# Altium PCB ShieldKL25zG18.PcbDoc
Units mm, origin at the board's own origin, x right, y up, seen from the top; angles counter-clockwise.
Board outline 56.26 x 59.94 mm, 2 copper layers (Top Layer, Bottom Layer); 24 components, 36 nets, 145 pads, 31 vias.
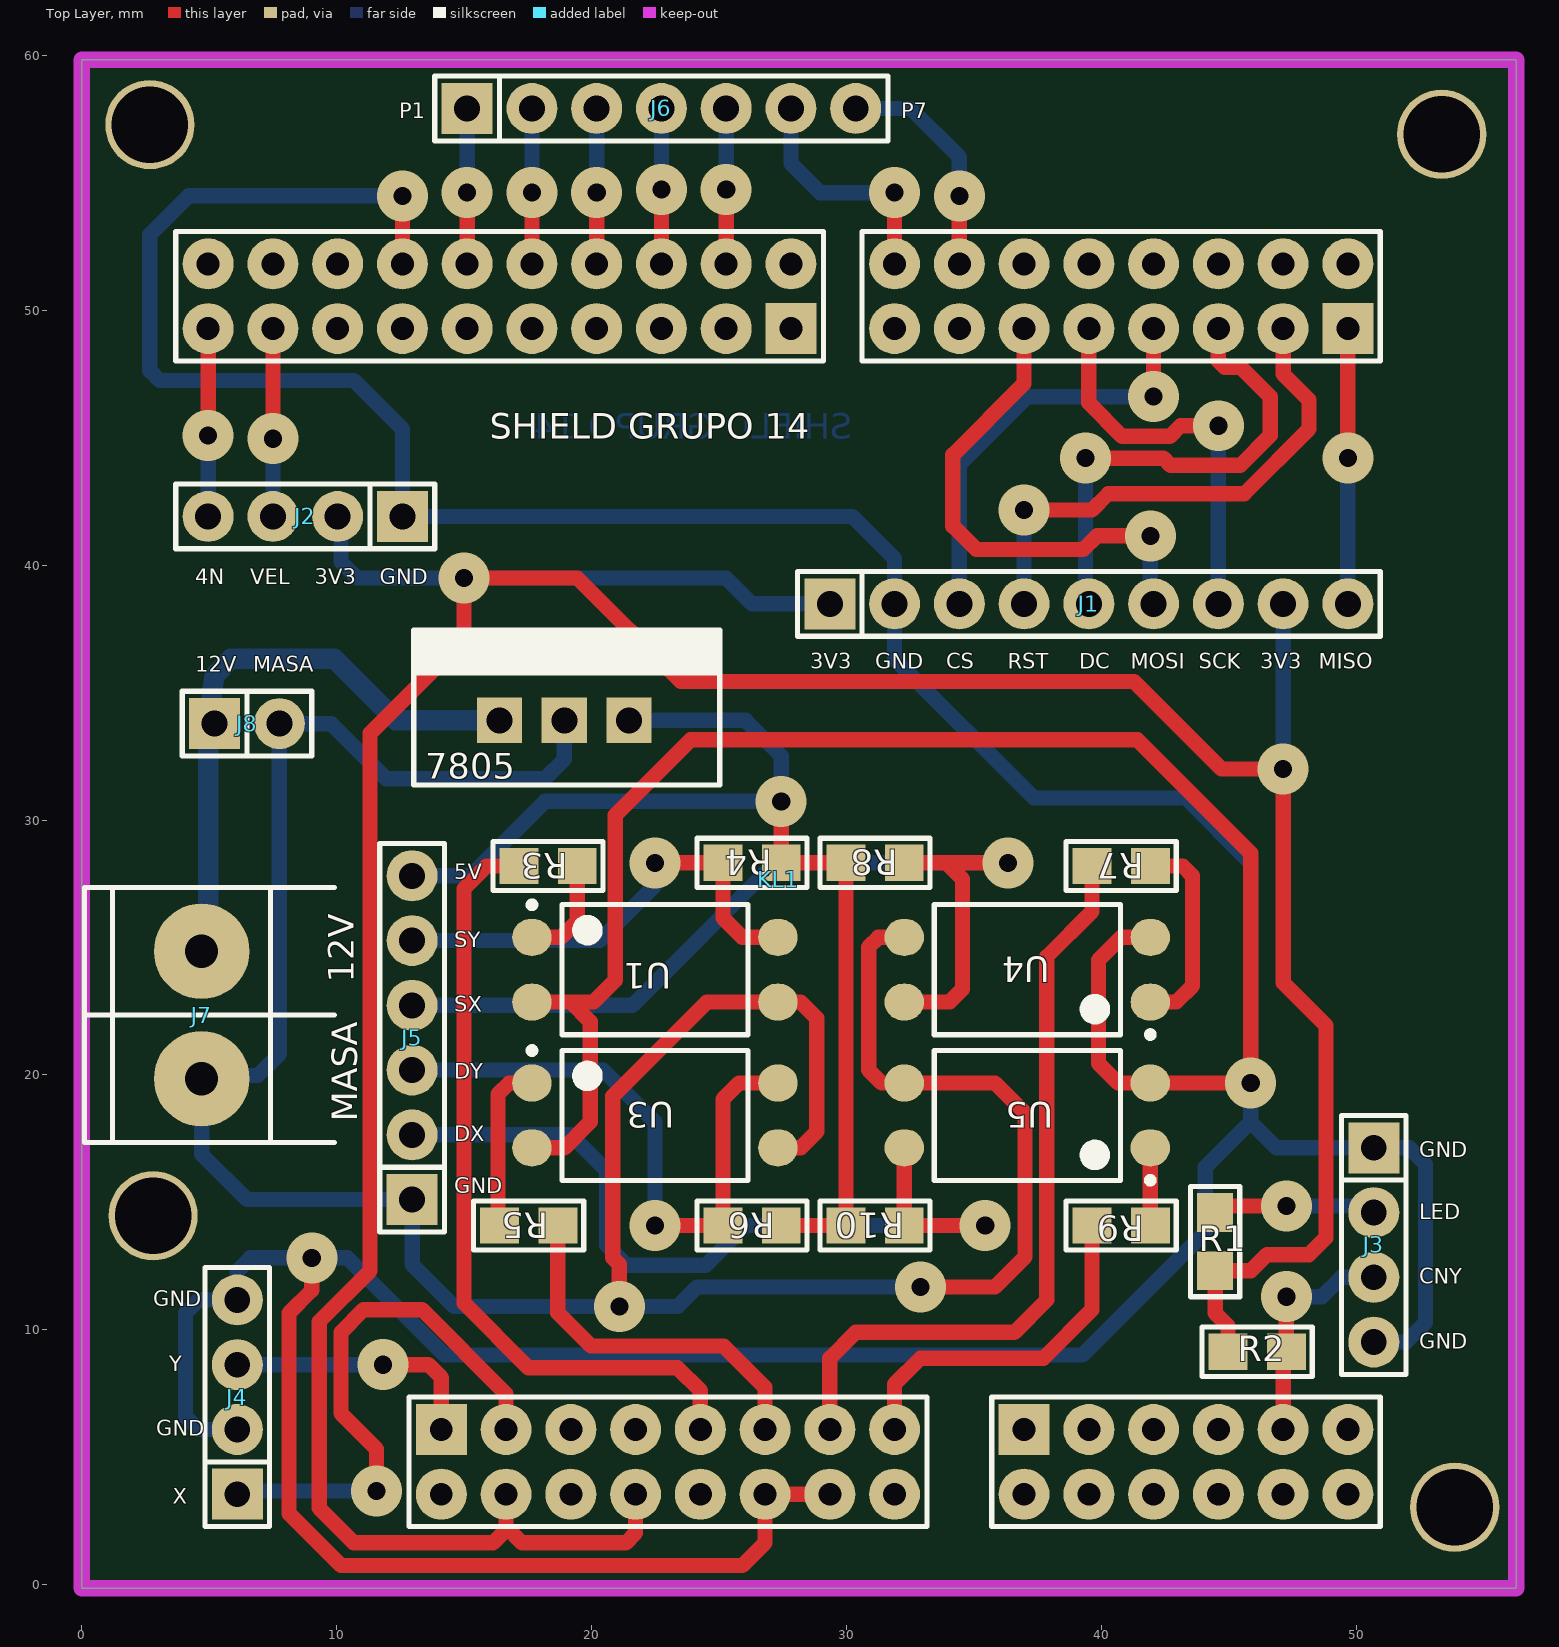
[diagram p0: Top Layer view]
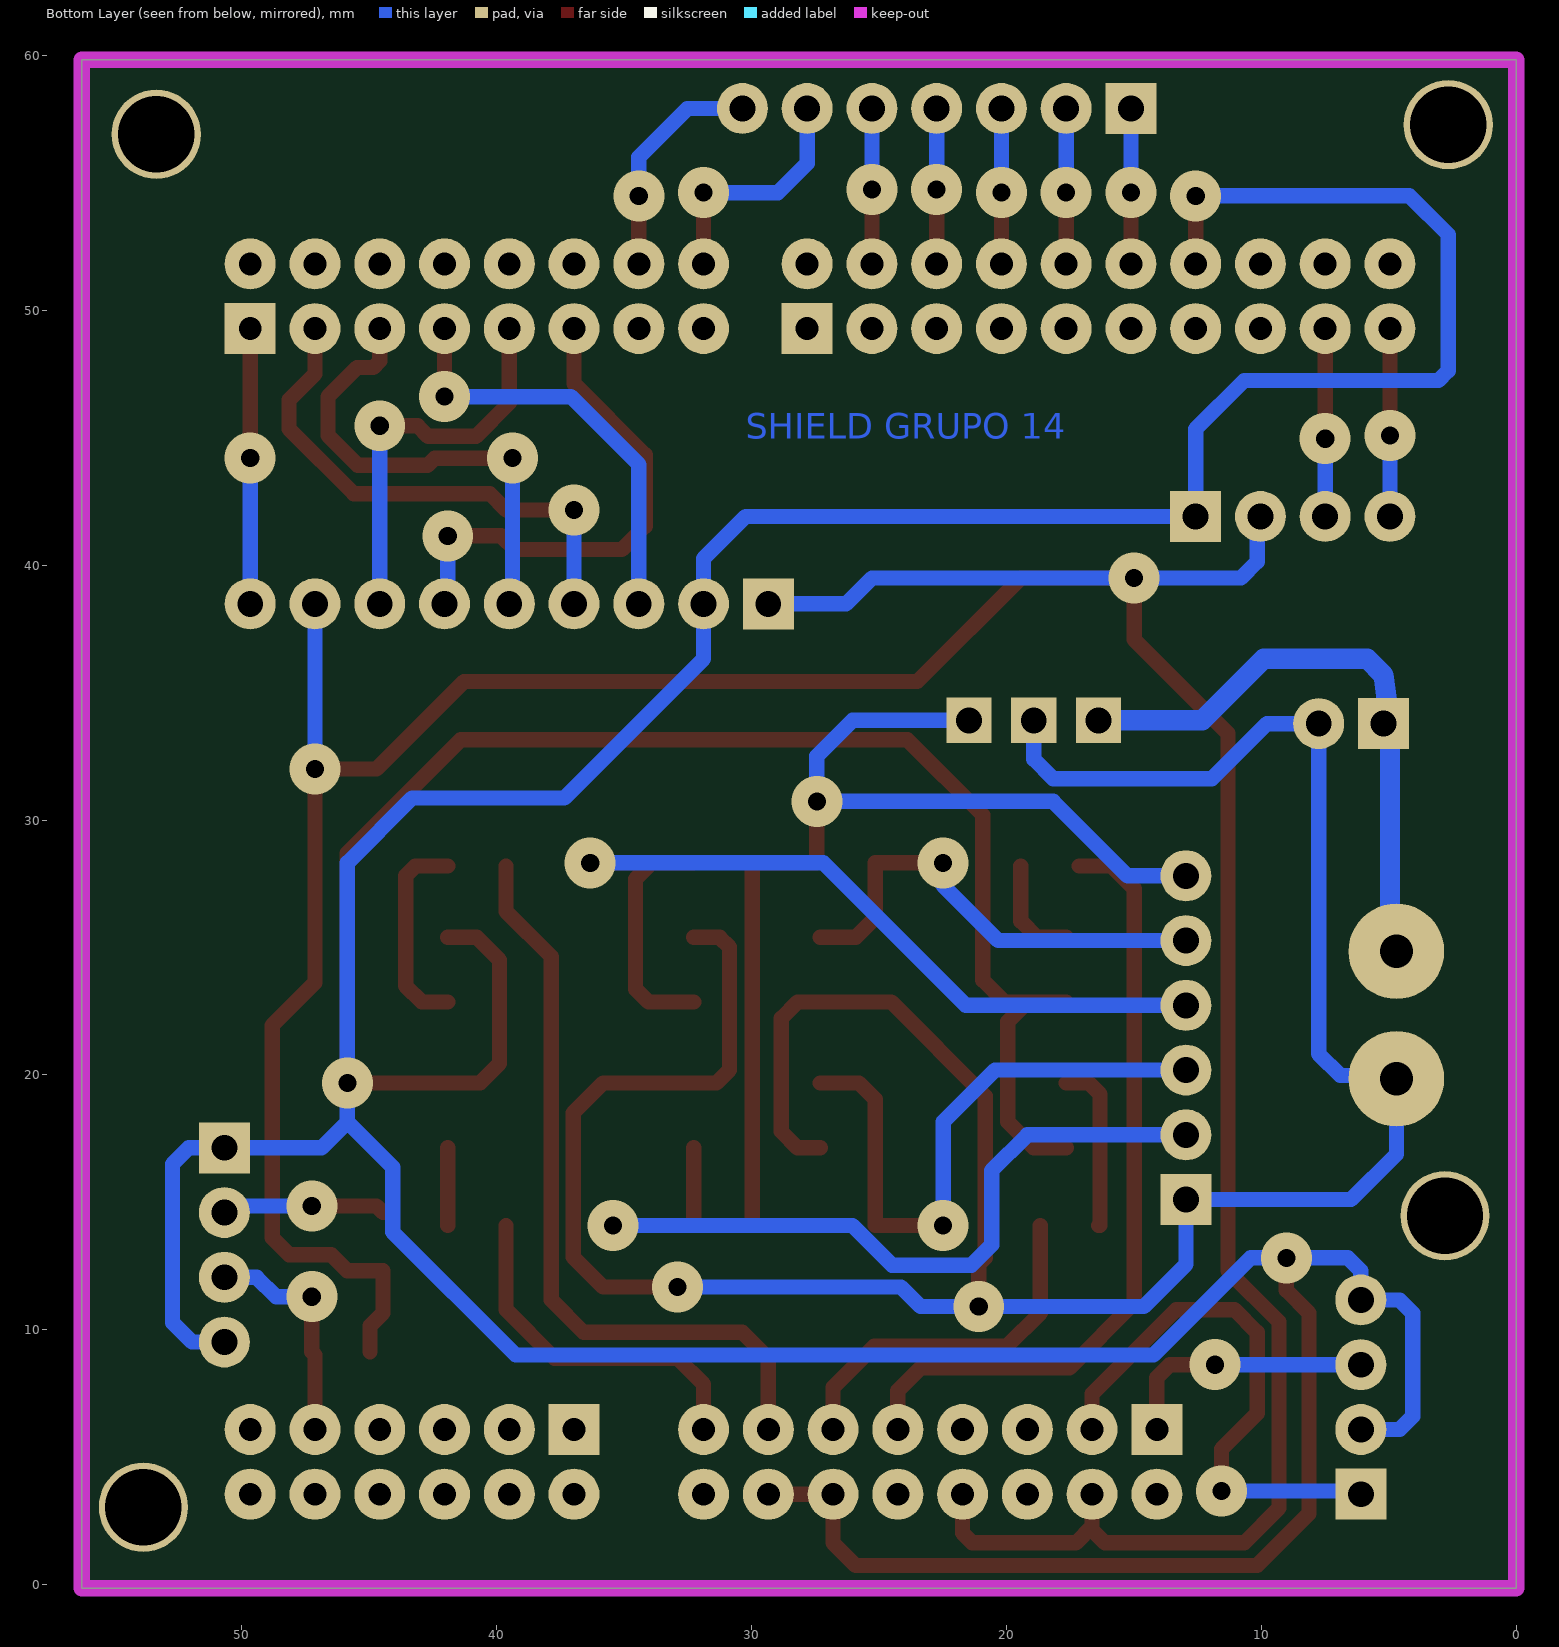
[diagram p1: Bottom Layer view, seen from below]

## Layer stack, top to bottom
Top Solder: solder mask 0.0102, Solder Resist, Dk 3.5
Top Layer: signal copper 0.0356
Dielectric 1: dielectric 0.32, FR-4, Dk 4.8
Bottom Layer: signal copper 0.0356
Bottom Solder: solder mask 0.0102, Solder Resist, Dk 3.5

## Board outline
0,-0.127 0,59.817 56.261,59.817 56.261,-0.127

## Design rules (kind name [scope] priority, off if disabled: settings)
Clearance Clearance_Polygon [InNamedPolygon('Polygon')] p1: gap=1 ignorepadtopadclearanceinfootprint=FALSE except(0: Arc-Hole Track-Hole SMDPad-Hole THPad-Hole Via-Hole Fill-Hole Poly-Hole Region-Hole Text-Hole)
Clearance [All] p2: gap=0.254 ignorepadtopadclearanceinfootprint=FALSE except(0: Arc-Hole Track-Hole SMDPad-Hole THPad-Hole Via-Hole Fill-Hole Poly-Hole Region-Hole Text-Hole)
ComponentClearance ComponentClearance_KL25z [InComponent('KL1')] p1: gap=0 collisioncheckmode=3 verticalgap=0 showdistances=FALSE
ComponentClearance [All] p2: gap=0.254 collisioncheckmode=3 verticalgap=0.254 showdistances=FALSE
PolygonConnect [All] p1: connectstyle=Relief reliefconductorwidth=0.254 reliefentries=4 polygonreliefangle="90 Angle" airgapwidth=0.254
RoutingVias [All] p1: holewidth=0.711 width=1.27 viastyle="Through Hole" minholewidth=0.711 minwidth=1.27 maxholewidth=0.711 maxwidth=1.27
SolderMaskExpansion [All] p1: expansion=0.102
Width [All] p1: maxlimit=0.8 minlimit=0.6 preferedwidth=0.6 minimp=50.000000 maximp=50.000000 favimp=50.000000
29 further rules are at their usual default settings.

## Components (designator, comment, footprint, x,y, rotation, side; value= is the part's Value field where it differs from the comment)
7805 "7805" "TO-220 V" 18.923,33.909 r0 top (schematic designator U2)
J1 "DISPLAY" SIP9 29.337,38.481 r0 top
J2 "TRIAC" SIP4 8.763,41.91 r180 top
J3 "CNY70" SIP4 50.673,13.335 r270 top
J4 "FC" SIP4 6.096,7.366 r90 top
J5 "ARDUINO" SIP6 12.954,15.113 r90 top
J6 "TECLADO MATRICIAL" SIP7 15.113,57.912 r0 top
J7 "FUENTE" BORNERA2 4.699,22.352 r0 top
J8 "CON2" SIP2 6.477,33.782 r0 top
KL1 "KL25z" "Freedom KL25Z Headerarray" 14.097,3.556 r90 top
R1 "220" 0805 44.45,13.462 r90 top
R2 "15K" 0805 46.101,9.144 r180 top
R3 "220" 0805 18.288,28.194 r0 top
R4 "10k" 0805 26.289,28.321 r0 top
R5 "220" 0805 17.526,14.097 r180 top
R6 "10k" 0805 26.289,14.097 r0 top
R7 "220" 0805 40.767,28.194 r0 top
R8 "10k" 0805 31.115,28.321 r180 top
R9 "220" 0805 40.767,14.097 r0 top
R10 "10k" 0805 31.115,14.097 r180 top
U1 "PC817S" OPTO_SMD 22.479,24.13 r0 top
U3 "PC817S" OPTO_SMD 22.479,18.415 r0 top
U4 "PC817S" OPTO_SMD 37.085,24.13 r180 top
U5 "PC817S" OPTO_SMD 37.084,18.415 r180 top

## Footprints (in the part's own frame and the unit in brackets; to place one, negate y for a bottom-side part, rotate by r counter-clockwise, add the part's x,y. Pads: shape width x height; smd on the part's side, far side on the other; paste and mask are expansions set on the pad)
0805 [mil] "Pasivo 0805"
  rect 60x56 smd: 1(-45,0) 2(45,0)
  silkscreen extent -85,-38 85,38, body extent -40,-25 39,25, height 15
BORNERA2 [mm] "Bornera con Tornillos 5mm separación"
  round 3.75 hole 1.3: 1(0,2.5) 2(0,-2.5)
  silkscreen extent -4.6,-5 5.2,5, body extent -3.76,-4.89 3.94,5.61, height 10
"Freedom KL25Z Headerarray" [mm] "Headerarray KL25Z Shield"
  round 2 hole 0.9: 1(48.26,-35.56) 2(48.26,-33.02) 3(48.26,-25.4) 4(48.26,-22.86) 5(48.26,-27.94) 6(48.26,-13.716) 7(45.72,-3.556) 8(45.72,-1.016) 9(0,-22.86) 10(0,-25.4) 11(0,-27.94) 12(0,-30.48) 14(2.54,-2.54) 15(2.54,-5.08) 16(2.54,-7.62) 17(45.72,-33.02) 18(0,-35.56) 19(0,-33.02) 20(45.72,-30.48) 21(45.72,-27.94) 22(45.72,-25.4) 23(45.72,-22.86) 25(48.26,-20.32) 26(48.26,-17.78) 27(45.72,-20.32) 28(45.72,-17.78) 30(45.72,-11.176) 31(45.72,-8.636) 32(45.72,-6.096) 33(48.26,-8.636) 34(48.26,-1.016) 35(48.26,-6.096) 36(48.26,-3.556) 37(48.26,-30.48) 38(48.26,-11.176) 39(45.72,6.604) 40(45.72,9.144) 41(48.26,6.604) 42(48.26,9.144) 43(2.54,-10.16) 44(2.54,-12.7) 45(2.54,-15.24) 46(2.54,-17.78) 48(2.54,-25.4) 49(2.54,-27.94) 50(2.54,-30.48) 51(2.54,-33.02) 52(2.54,-35.56) 53(45.72,1.524) 54(0,-2.54) 55(0,-5.08) 56(0,-7.62) 57(0,-10.16) 58(0,-12.7) 59(0,-15.24) 60(0,-17.78) 61(45.72,4.064) 62(48.26,4.064) 63(48.26,1.524) 64(0,0)
  rect 2x2 hole 0.9: 13(2.54,0) 24(45.72,-35.56) 29(45.72,-13.716) 47(2.54,-22.86)
  silkscreen extent -1.27,-36.83 49.53,10.41
OPTO_SMD [mm] "SOP, 4-Leads, Body 4,60x7,62mm, Pitch 2,54mm, IPC Medium Density"
  oval 1.55x1.45 smd: 1(-4.825,1.27) 2(-4.825,-1.27) 3(4.825,-1.27) 4(4.825,1.27)
  silkscreen extent -4.95,-2.55 3.65,2.67, body extent -4.05,-2.55 4.05,2.55, height 4.15
SIP2 [mm]
  rect 2x2 hole 1.016: 1(-1.27,0)
  round 2 hole 1.016: 2(1.27,0)
  silkscreen extent -2.54,-1.27 2.54,1.27
SIP4 [mm]
  rect 2x2 hole 1.016: 1(-3.81,0)
  round 2 hole 1.016: 2(-1.27,0) 3(1.27,0) 4(3.81,0)
  silkscreen extent -5.08,-1.27 5.08,1.27, body extent -5.08,-1.27 5.08,1.27, height 8.38
SIP6 [mm]
  rect 2x2 hole 1.016: 1(0,0)
  round 2 hole 1.016: 2(2.54,0) 3(5.08,0) 4(7.62,0) 5(10.16,0) 6(12.7,0)
  silkscreen extent -1.27,-1.27 13.97,1.27, body extent -1.27,-1.3 13.97,1.24, height 8.38
SIP7 [mm]
  rect 2x2 hole 1.016: 1(0,0)
  round 2 hole 1.016: 2(2.54,0) 3(5.08,0) 4(7.62,0) 5(10.16,0) 6(12.7,0) 7(15.24,0)
  silkscreen extent -1.27,-1.27 16.51,1.27, body extent -1.27,-1.3 16.51,1.27, height 8.38
SIP9 [mm]
  rect 2x2 hole 1.016: 1(0,0)
  round 2 hole 1.016: 2(2.54,0) 3(5.08,0) 4(7.62,0) 5(10.16,0) 6(12.7,0) 7(15.24,0) 8(17.78,0) 9(20.32,0)
  silkscreen extent -1.27,-1.27 21.59,1.27, body extent -1.27,-1.3 21.59,1.24, height 8.38
"TO-220 V" [mil]
  rect 70x70 hole 40: 1(-100,0) 2(0,0) 3(100,0)
  silkscreen extent -232,-100 240,139, body extent -197,-79 197,118, height 709

## Part data
7805: library part 78XX, "REGULDOR POSITIVO"
J1: library part CON9
J2 J3 J4: library part CON4
J5: library part CON6
J6: library part CON7
J7: library part "BORNERA 2"
R1 R2 R3 R4 R5 R6 R7 R8 R9 R10: library part RES
U1 U3 U4 U5: library part OPTO_SMD
KL1: Creador="DONADON, Tiago", Fecha=06/07/2022

## Free pads (board coordinates)
  round 3.5 hole 3: 0(2.667,57.277) 0(2.794,14.478) 0(53.34,56.896) 0(53.848,3.048)

## Via types
v1: diameter 2, hole 0.711, Top Layer to Bottom Layer, 31 vias

## Nets (pads, with @x,y where several pads share a name; then routed paths per layer and width w, separated by ;. In a path a pad name is that pad's centre, name@x,y a point inside that pad or via, vN(x,y) a via of type N, cw(c..) or ccw(c..) an arc to the next point about the centre after c; other vN are vias at no path point)
3V3: J1.1 J1.8 J2.2 KL1.54 KL1.56 R1.1 R2.2 | length 146.1
  Top Layer w0.6: KL1.54 16.637,2.286 ; KL1.56 21.717,2.032 21.336,1.651 17.272,1.651 16.637,2.286 ; R2.2 44.958,10.16 44.45,10.668 R1.1 45.847,12.319 46.482,12.954 48.133,12.954 48.798,13.619 48.798,21.941 47.117,23.622 v1(47.117,32.004) 44.704,32.004 41.275,35.433 23.495,35.433 19.431,39.497 v1(14.986,39.497) 14.986,37.084 11.303,33.401 11.303,12.319 9.306,10.322 9.306,3.013 10.668,1.651 16.129,1.651 16.637,2.159 16.637,2.286
  Bottom Layer w0.6: J2.2 10.16,41.783 10.16,40.132 10.795,39.497 v1(14.986,39.497) 25.273,39.497 26.289,38.481 J1.1 ; v1(47.117,32.004) J1.8
4N25: J2.4 KL1.40 | length 7.4
  Top Layer w0.6: v1(4.953,45.085) KL1.40
  Bottom Layer w0.6: J2.4 v1(4.953,45.085)
5V: 7805.3 J5.6 R4.2 R6.2 R8.2 R10.2 | length 45.7
  Top Layer w0.6: R6.2 R10.2 R8.2 R4.2 v1(27.432,30.734)
  Bottom Layer w0.6: J5.6 15.24,27.813 18.161,30.734 v1(27.432,30.734) 27.432,32.512 26.035,33.909 7805.3
12V: 7805.1 J7.1 J8.1 | length 23.2
  Bottom Layer w0.8: J7.1@4.953,24.979 4.953,33.782 4.957,33.815 5.207,35.687 5.842,36.322 9.906,36.322 12.319,33.909 7805.1
CNYKL: J3.3 KL1.51 R2.1 | length 9
  Top Layer w0.6: KL1.51 47.117,9.017 R2.1 v1(47.244,11.303)
  Bottom Layer w0.6: v1(47.244,11.303) 48.641,11.303 49.403,12.065 J3.3
CS: J1.3 KL1.21 | length 16.9
  Top Layer w0.6: v1(42.037,46.609) KL1.21
  Bottom Layer w0.6: J1.3 34.417,43.942 37.084,46.609 v1(42.037,46.609)
DC/RS: J1.5 KL1.20 | length 19
  Top Layer w0.6: v1(39.37,44.196) 42.418,44.196 42.702,43.912 45.436,43.912 46.609,45.085 46.609,46.609 45.466,47.752 44.831,47.752 44.577,48.006 KL1.20
  Bottom Layer w0.6: v1(39.37,44.196) 39.37,38.608 J1.5
DIR_X: KL1.46 R9.1 | length 14
  Top Layer w0.6: KL1.46 31.877,7.874 32.893,8.89 37.719,8.89 39.624,10.795 R9.1
DIR_X1: J5.2 R10.1 U5.4 | length 33.2
  Top Layer w0.6: U5.4 U5.4 R10.1 v1(35.433,14.097)
  Bottom Layer w0.6: J5.2 19.177,17.653 20.574,16.256 20.574,13.335 21.366,12.543 24.481,12.543 26.035,14.097 v1(35.433,14.097)
DIR_Y: KL1.44 R5.1 | length 14.4
  Top Layer w0.6: R5.1 18.669,10.668 19.969,9.368 25.176,9.368 26.797,7.747 KL1.44
DIR_Y1: J5.3 R6.1 U3.4 | length 24.5
  Top Layer w0.6: v1(22.479,14.097) R6.1 25.146,19.05 25.781,19.685 U3.4
  Bottom Layer w0.6: J5.3 20.447,20.193 22.479,18.161 v1(22.479,14.097)
FC_X: J4.1 KL1.14 | length 21.9
  Top Layer w0.6: v1(11.557,3.683) 11.557,5.334 10.16,6.731 10.16,9.906 11.049,10.795 13.335,10.795 16.637,7.493 KL1.14
  Bottom Layer w0.6: J4.1 6.223,3.683 v1(11.557,3.683)
FC_Y: J4.3 KL1.13 | length 10.2
  Top Layer w0.6: v1(11.811,8.636) 13.589,8.636 14.097,8.128 KL1.13
  Bottom Layer w0.6: J4.3 v1(11.811,8.636)
GND: J1.2 J2.1 J3.1 J3.4 J4.2 J4.4 KL1.58 KL1.59 KL1.63 U1.2 U3.2 U4.2 U5.2 | length 259.2
  Top Layer w0.6: v1(9.017,12.827) 9.017,11.557 8.128,10.668 8.128,2.794 10.16,0.762 25.908,0.762 26.797,1.651 KL1.58 KL1.59 ; KL1.63 12.446,51.943 12.573,52.07 v1(12.573,54.483) ; U3.2 18.923,17.145 19.939,18.161 19.939,22.098 19.177,22.86 ; U1.2 19.177,22.86 ; U4.2 40.767,25.4 39.878,24.511 39.878,20.447 40.64,19.685 U5.2 v1(45.847,19.685) 45.847,28.702 41.402,33.147 23.876,33.147 20.925,30.196 20.925,23.719 20.066,22.86 19.177,22.86
  Bottom Layer w0.6: J4.2 4.572,6.096 4.064,6.604 4.064,10.668 4.572,11.176 J4.4 6.096,12.319 6.604,12.827 v1(9.017,12.827) 10.414,12.827 14.224,9.017 39.243,9.017 44.069,13.843 44.069,16.383 45.847,18.161 ; v1(12.573,54.483) 4.191,54.483 2.667,52.959 2.667,47.625 3.048,47.244 10.668,47.244 12.573,45.339 J2.1 30.226,41.91 31.877,40.259 J1.2 31.877,36.322 37.338,30.861 43.307,30.861 45.847,28.321 v1(45.847,19.685) 45.847,18.161 ; J3.4 51.943,9.525 52.705,10.287 52.705,16.51 52.07,17.145 J3.1 46.863,17.145 45.847,18.161
GND_ARD: 7805.2 J5.1 J7.2 J8.2 U1.3 U3.3 U4.3 U5.3 | length 113.6
  Top Layer w0.6: v1(21.082,10.922) 21.082,12.573 20.828,12.827 20.828,19.177 24.511,22.86 U1.3 28.194,22.86 28.829,22.225 28.829,17.78 28.194,17.145 U3.3 ; U4.3 31.242,25.4 30.861,25.019 30.861,20.193 31.369,19.685 U5.3 35.814,19.685 36.992,18.507 36.992,12.862 35.814,11.684 v1(32.893,11.684)
  Bottom Layer w0.6: 7805.2 18.923,32.385 18.161,31.623 11.938,31.623 9.779,33.782 J8.2 7.747,20.828 6.898,19.979 4.699,19.979 J7.2 4.699,16.891 6.477,15.113 J5.1 12.954,12.573 14.605,10.922 v1(21.082,10.922) 23.368,10.922 24.13,11.684 v1(32.893,11.684)
MISO: J1.9 KL1.24 | length 10.8
  Top Layer w0.6: v1(49.657,44.196) KL1.24
  Bottom Layer w0.6: J1.9 v1(49.657,44.196)
MOSI: J1.6 KL1.23 | length 20
  Top Layer w0.6: KL1.23 36.957,47.117 34.163,44.323 34.163,41.529 35.082,40.61 39.278,40.61 39.816,41.148 v1(41.91,41.148)
  Bottom Layer w0.6: v1(41.91,41.148) 41.91,38.608 J1.6
NetJ3_2: J3.2 R1.2 | length 6.4
  Top Layer w0.6: R1.2 44.704,14.859 v1(47.244,14.859)
  Bottom Layer w0.6: v1(47.244,14.859) 50.419,14.859 J3.2
NetR3_2: R3.2 U1.1 | length 4.2
  Top Layer w0.6: U1.1 18.796,25.4 19.431,26.035 R3.2
NetR5_2: R5.2 U3.1 | length 6.7
  Top Layer w0.6: R5.2 16.325,14.097 16.325,19.246 16.764,19.685 U3.1
NetR7_2: R7.2 U4.1 | length 8
  Top Layer w0.6: U4.1 42.926,22.86 43.561,23.495 43.561,27.813 43.18,28.194 R7.2
NetR9_2: R9.2 U5.1 | length 3
  Top Layer w0.6: U5.1 R9.2 R9.2
P1: J6.1 KL1.34 | length 6.1
  Top Layer w0.6: KL1.34 v1(15.113,54.61)
  Bottom Layer w0.6: v1(15.113,54.61) J6.1
P2: J6.2 KL1.36 | length 6.1
  Top Layer w0.6: KL1.36 v1(17.653,54.61)
  Bottom Layer w0.6: v1(17.653,54.61) J6.2
P3: J6.3 KL1.35 | length 6.1
  Top Layer w0.6: KL1.35 v1(20.193,54.61)
  Bottom Layer w0.6: v1(20.193,54.61) J6.3
P4: J6.4 KL1.33 | length 6.1
  Top Layer w0.6: KL1.33 v1(22.733,54.737)
  Bottom Layer w0.6: v1(22.733,54.737) J6.4
P5: J6.5 KL1.38 | length 6.1
  Top Layer w0.6: KL1.38 v1(25.273,54.737)
  Bottom Layer w0.6: v1(25.273,54.737) J6.5
P6: J6.6 KL1.26 | length 9.5
  Top Layer w0.6: KL1.26 v1(31.877,54.61)
  Bottom Layer w0.6: J6.6 27.813,55.753 28.956,54.61 v1(31.877,54.61)
P7: J6.7 KL1.25 | length 9
  Top Layer w0.6: KL1.25 v1(34.417,54.483)
  Bottom Layer w0.6: J6.7 32.512,57.912 34.417,56.007 v1(34.417,54.483)
RST: J1.4 KL1.17 | length 20.5
  Top Layer w0.6: v1(36.957,42.164) 39.624,42.164 40.259,42.799 45.593,42.799 48.133,45.339 48.133,46.482 47.117,47.498 KL1.17
  Bottom Layer w0.6: J1.4 v1(36.957,42.164)
SCK: J1.7 KL1.22 | length 15.7
  Top Layer w0.6: KL1.22 39.497,46.355 40.802,45.05 42.676,45.05 43.092,45.466 v1(44.577,45.466)
  Bottom Layer w0.6: J1.7 v1(44.577,45.466)
STEP_X: KL1.45 R7.1 | length 30
  Top Layer w0.6: KL1.45 29.337,8.89 30.353,9.906 36.576,9.906 37.846,11.176 37.846,24.638 39.624,26.416 R7.1
STEP_X1: J5.4 R8.1 U4.4 | length 37.5
  Top Layer w0.6: R8.1 33.909,28.321 ; U4.4 34.036,22.86 34.544,23.368 34.544,27.686 33.909,28.321 ; v1(36.322,28.321) 33.909,28.321
  Bottom Layer w0.6: J5.4 21.59,22.733 27.178,28.321 v1(36.322,28.321)
STEP_Y: KL1.43 R3.1 | length 31
  Top Layer w0.6: R3.1 15.875,28.194 14.986,27.305 14.986,11.049 17.521,8.514 23.363,8.514 24.257,7.62 KL1.43
STEP_Y1: J5.5 R4.1 U1.4 | length 18.6
  Top Layer w0.6: v1(22.479,28.321) R4.1 25.146,26.162 25.908,25.4 U1.4
  Bottom Layer w0.6: J5.5 20.32,25.273 22.479,27.432 v1(22.479,28.321)
VEL: J2.3 KL1.39 | length 7.2
  Top Layer w0.6: v1(7.493,44.958) KL1.39
  Bottom Layer w0.6: J2.3 v1@7.493,44.831
pads on no net: KL1.1 KL1.2 KL1.3 KL1.4 KL1.5 KL1.6 KL1.7 KL1.8 KL1.9 KL1.10 KL1.11 KL1.12 KL1.15 KL1.16 KL1.18 KL1.19 KL1.27 KL1.28 KL1.29 KL1.30 KL1.31 KL1.32 KL1.37 KL1.41 KL1.42 KL1.47 KL1.48 KL1.49 KL1.50 KL1.52 KL1.53 KL1.55 KL1.57 KL1.60 KL1.61 KL1.62 KL1.64

## Keep-outs
Keep-Out Layer:
  the board outline again, w0.65

## Other copper
Bottom Layer:
  text "SHIELD GRUPO 14" at 30.226,44.958 h1

## Silkscreen, mask and mechanical layers (free items; w line width, h text height)
Top Overlay:
  text "P1" at 12.446,57.531 h0.6
  text "P7" at 32.131,57.531 h0.6
  text "SHIELD GRUPO 14" at 16.002,44.958 h1
  text "4N" at 4.445,39.243 h0.6
  text "VEL" at 6.604,39.243 h0.6
  text "3V3" at 9.144,39.243 h0.6
  text "GND" at 11.684,39.243 h0.6
  text "3V3" at 28.575,35.941 h0.6
  text "GND" at 31.115,35.941 h0.6
  text "CS" at 33.909,35.941 h0.6
  text "RST" at 36.322,35.941 h0.6
  text "DC" at 39.116,35.941 h0.6
  text "MOSI" at 41.148,35.941 h0.6
  text "SCK" at 43.815,35.941 h0.6
  text "3V3" at 46.228,35.941 h0.6
  text "MISO" at 48.514,35.941 h0.6
  text "12V" at 4.445,35.814 h0.6
  text "MASA" at 6.731,35.814 h0.6
  text "5V" at 14.605,27.686 h0.6
  text "SY" at 14.605,25.019 h0.6
  text "12V" at 10.668,23.622 h1 r90
  text "SX" at 14.605,22.479 h0.6
  text "DY" at 14.605,19.852 h0.6
  text "MASA" at 10.795,18.161 h1 r90
  text "DX" at 14.605,17.399 h0.6
  text "GND" at 52.451,16.764 h0.6
  text "GND" at 14.605,15.367 h0.6
  text "LED" at 52.451,14.351 h0.6
  text "CNY" at 52.451,11.811 h0.6
  text "GND" at 2.794,10.922 h0.6
  text "GND" at 52.451,9.271 h0.6
  text "Y" at 3.429,8.382 h0.6
  text "GND" at 2.921,5.842 h0.6
  text "X" at 3.556,3.175 h0.6